# EAGLE board Arduino HomeMonitorv2r1 (EAGLE 6.5.0)
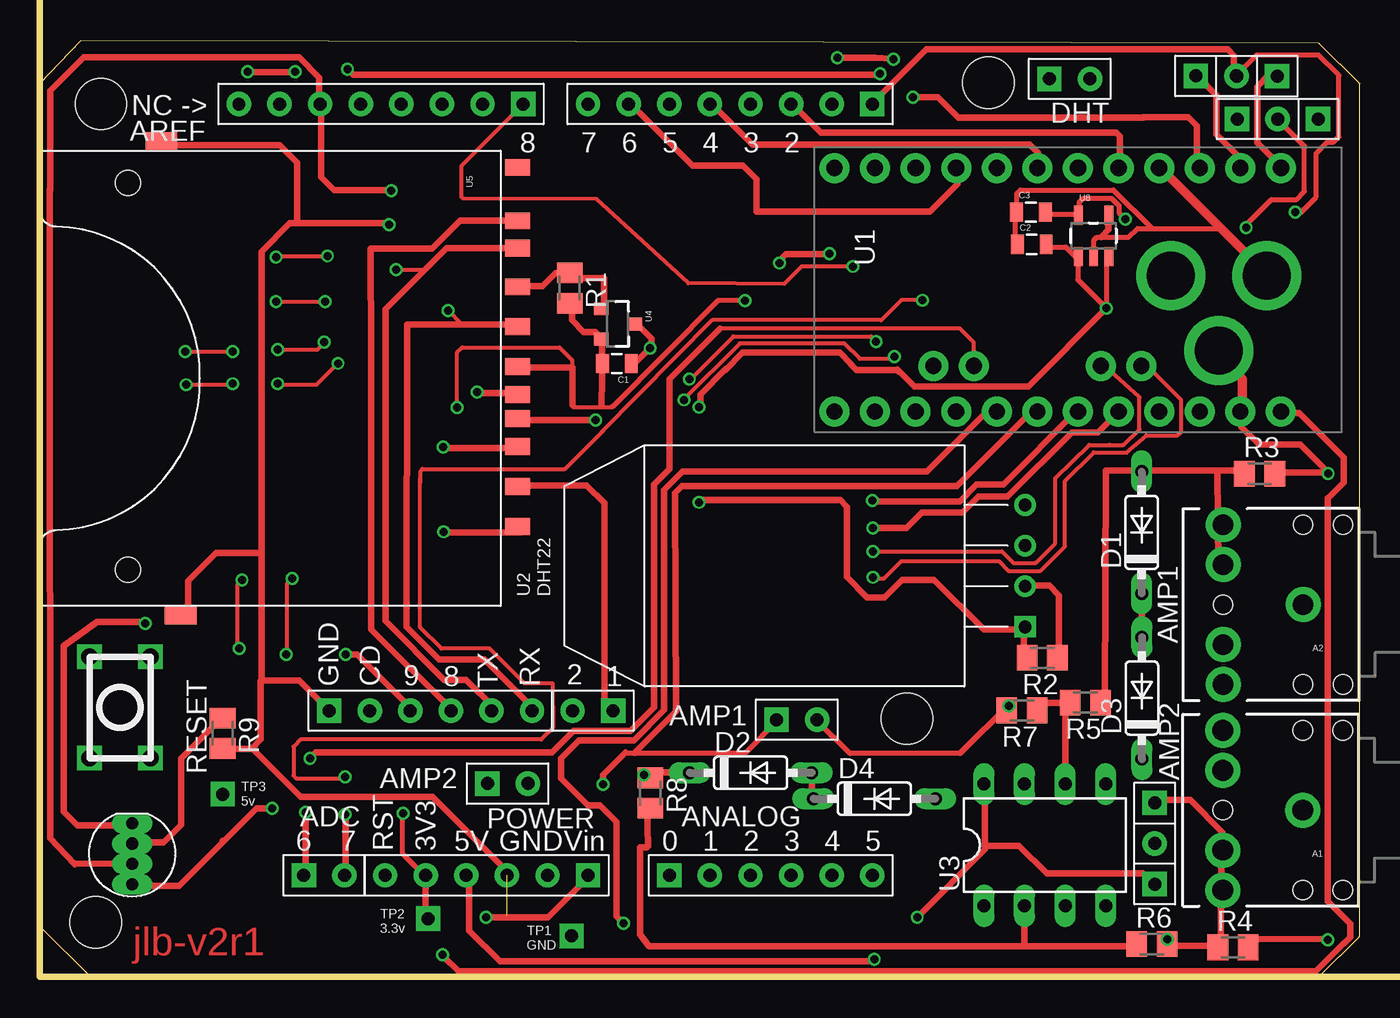
[diagram p0: board, top side]
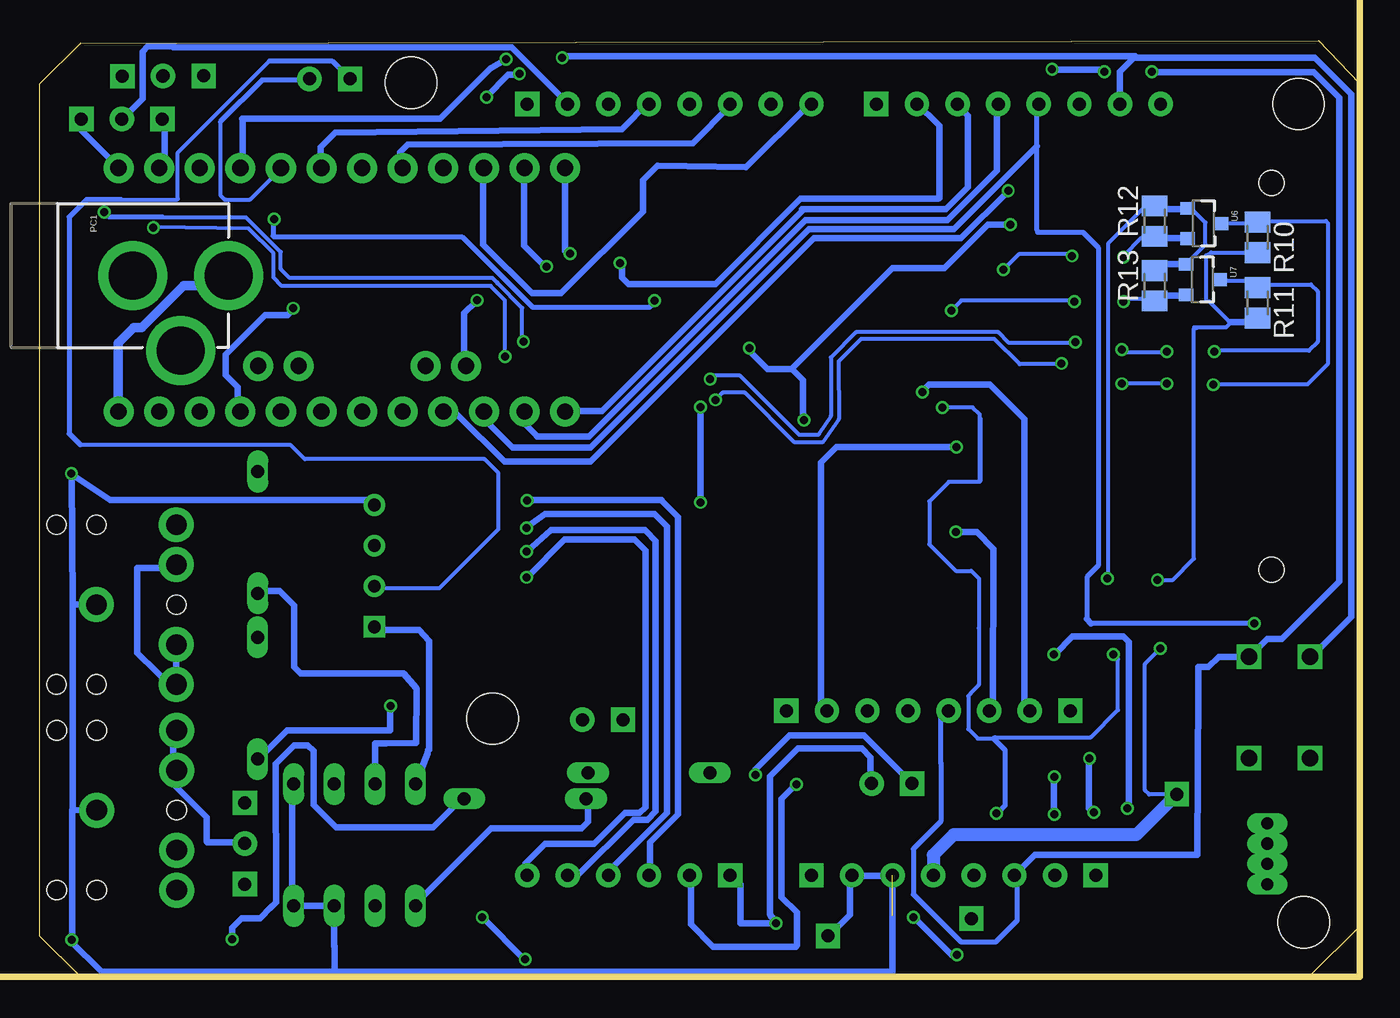
[diagram p1: board, bottom side, seen from below]

Size 82.55 x 58.57 mm. Coordinates in mm from the lower left corner, seen from the top.
Outline: 0,3.17 3.17,0 80.01,0 82.55,2.54 82.55,55.88 80.01,58.42 2.54,58.57 0,55.88 0,3.17
Copper layers (1*16): Top 0.035mm / dielectric 1.5mm / Bottom 0.035mm
Design rules "default": minimum track width 0.1mm, minimum drill 0.3mm, track to track 6mil, track to pad 6mil, pad to pad 6mil, via to via 6mil, smd to smd 6mil, copper to edge 10mil, drill to drill 10mil, minimum pad ring 10mil, minimum via ring 6mil, stop-mask expansion 2mil, vias tented up to drill 25mil, thermal gap 10mil
Net classes: 0 default: width 0.003 mm, drill 0.254 mm, clearance 0.152 mm
Holes 3.2 mm at 3.81,54.61 3.48,3.41 59.33,55.94 54.24,16.15
Milling: 4 lines

## Footprints (pad centres in the part's own frame; a part is rotated, then mirrored left to right if it is on the bottom)
AUDIO-JACK = drill 1.3 pad 2.184: RING 5,5; RSH 5,2.5; SLEEVE 0,0; TIP 5,-5; TSH 5,-2.5 | hole 1.2: 0,5; -2.5,5; -2.5,-5; 0,-5; 5,0
CK_1*2 = drill 0.813 pad 1.524 square: 1 0,1.27 | drill 0.813 pad 1.524: 2 0,-1.27
0805 = smd 0.8 x 1.2: 1 -0.9,0; 2 0.9,0
DO35-7 = drill 0.813 long: A 3.81,0; C -3.81,0
LED-RGB-THRU = drill 0.762 pad 0.889 long: 1 1.905,0; 2 0.635,0; 3 -0.635,0; 4 -1.905,0
CK_1X8 = drill 0.813 pad 1.524 square: 1 0,8.89 | drill 0.813 pad 1.524: 2 0,6.35; 3 0,3.81; 4 0,1.27; 5 0,-1.27; 6 0,-3.81; 7 0,-6.35; 8 0,-8.89
CK_1*6 = drill 0.813 pad 1.524 square: 1 0,6.35 | drill 0.813 pad 1.524: 2 0,3.81; 3 0,1.27; 4 0,-1.27; 5 0,-3.81; 6 0,-6.35
POWER_JACK_PTH = drill 2.997 pad 4.318: GND 0,7.7; GNDBREAK 4.7,10.7; PWR 0,13.7
M0805 = smd 1.3 x 1.6: 1 -0.95,0; 2 0.95,0
ARDUINO_PRO_MINI = drill 1.016 pad 1.88: 1 -7.62,12.7; 2 -7.62,10.16; 3 -7.62,7.62; 4 -7.62,5.08; 5 -7.62,2.54; 6 -7.62,0; 7 -7.62,-2.54; 8 -7.62,-5.08; 9 -7.62,-7.62; 10 -7.62,-10.16; 11 -7.62,-12.7; 12 -7.62,-15.24; 13 7.62,-15.24; 14 7.62,-12.7; 15 7.62,-10.16; 16 7.62,-7.62; 17 7.62,-5.08; 18 7.62,-2.54; 19 7.62,0; 20 7.62,2.54; 21 7.62,5.08; 22 7.62,7.62; 23 7.62,10.16; 24 7.62,12.7; A4 4.763,1.429; A5 4.763,3.969; A6 4.763,-9.049; A7 4.763,-6.509
AM2302 = drill 0.8 pad 1.35 square: P$1 -3.81,-13.8 | drill 0.8 pad 1.35: P$2 -1.27,-13.8; P$3 1.27,-13.8; P$4 3.81,-13.8
DIL08 = drill 0.813 long: 1 -3.81,-3.81; 2 -1.27,-3.81; 3 1.27,-3.81; 4 3.81,-3.81; 5 3.81,3.81; 6 1.27,3.81; 7 -1.27,3.81; 8 -3.81,3.81
SOT23-3 = smd 0.8 x 0.9: 1 -0.95,-1; 2 0.95,-1; 3 0,1.1
SD_MMC_SOCKET = smd 1.05 x 1.56: 1 6.77,29.87; 2 4.27,29.87; 3 2.52,29.87; 4 -0.73,29.87; 5 -3.23,29.87; 6 -5.73,29.87; 7 -8.15,29.87; 8 -9.85,29.87; 9 9.27,29.87; CD 1.02,29.87; WP -13.2,29.87 | smd 1.2 x 2: S1 -14.8,7.6; S2 14.8,8.8 | hole 1.55: 11.98,5.5; -12.22,5.5
SOT23-5 = smd 0.55 x 1.2: 1 -0.95,-1.3; 2 0,-1.3; 3 0.95,-1.3; 4 0.95,1.3; 5 -0.95,1.3

## Placement (x,y rotation side)
A1  [AUDIO-JACK]  79,10.43 180 top
A2  [AUDIO-JACK]  79.02,23.29 180 top
ADC6_1  CK_12  [CK_1*2]  64.42,56.18 90 top
ADC6_2  CK_12  [CK_1*2]  34.59,16.65 270 top
ADC6_3  CK_12  [CK_1*2]  29.26,12.09 90 top
ADC6_4  CK_12  [CK_1*2]  47.34,16.09 90 top
ADC6_5  CK_12  [CK_1*2]  69.74,7.07 180 top
ADC6_6  CK_12  [CK_1*2]  69.74,9.61 0 top
ADC6_7  CK_12  [CK_1*2]  17.78,6.35 90 top
ADC6_8  CK_12  [CK_1*2]  73.58,56.36 90 top
ADC6_9  CK_12  [CK_1*2]  76.13,56.35 270 top
ADC6_10  CK_12  [CK_1*2]  76.16,53.67 90 top
ADC6_11  CK_12  [CK_1*2]  78.69,53.67 270 top
C1  0.1uF  [0805]  36.1,38.36 180 top
C2  10uF  [0805]  62.04,45.82 0 top
C3  10uF  [0805]  61.99,47.85 0 top
D1  [DO35-7]  68.92,27.8 90 top
D2  [DO35-7]  44.46,12.77 0 top
D3  [DO35-7]  68.93,17.44 90 top
D4  [DO35-7]  52.2,11.14 0 top
E$1  [LED-RGB-THRU]  5.77,7.7 90 top
PB  CK_1X8  [CK_1X8]  21.34,54.61 270 top
PC  [CK_1*6]  45.72,6.35 90 top
PC1  [POWER_JACK_PTH]  84.45,43.88 270 bottom
PD  CK_1X8  [CK_1X8]  43.18,54.61 270 top
POWER  [CK_1*6]  27.94,6.35 270 top
POWER1  [CK_1*6]  24.44,16.65 90 top
R1  100k  [M0805]  33.13,43.09 270 top
R2  [M0805]  62.7,19.96 180 top
R3  [M0805]  76.3,31.48 0 top
R4  [M0805]  74.63,1.85 0 top
R5  [M0805]  65.4,17.16 180 top
R6  [M0805]  69.56,2.05 0 top
R7  [M0805]  61.43,16.67 180 top
R8  [M0805]  38.19,11.5 270 top
R9  [M0805]  11.43,15.24 270 top
R10  [M0805]  6.38,46.27 270 bottom
R11  [M0805]  6.38,42.16 270 bottom
R12  [M0805]  12.83,47.28 90 bottom
R13  [M0805]  12.82,43.24 90 bottom
U1  [ARDUINO_PRO_MINI]  64.94,42.99 270 top
U2  DHT22  [AM2302]  47.83,25.71 90 top
U3  [DIL08]  62.87,8.26 0 top
U4  ATSHA204-TSU  [SOT23-3]  36.12,40.84 270 top
U5  [SD_MMC_SOCKET]  0,37.44 270 top
U6  BSS138  [SOT23-3]  9.77,47.13 270 bottom
U7  [SOT23-3]  9.84,43.62 270 bottom
U8  MIC5219-3.3  [SOT23-5]  65.91,46.35 0 top

## Library data of the parts
A1 A2 PC1 = SparkFun-Connectors
ADC6_1-ADC6_11 PB PC PD POWER POWER1 = CONNECTER
C1-C3 = SparkFun-Passives
D1-D4 R1-R13 U3 = adafruit
E$1 = SparkFun-LED
U1 = SparkFun-Boards-Custom
U2 = sensor
U4 U6 U7 = SparkFun-DigitalIC
U5 = SparkFun-RF
U8 = SparkFun-PowerIC

## Nets
---: U3.3 U3.4
RST: POWER.6
S$5: U3.7
S$10: U3.2
S$11: U3.6
S$25: POWER.4
S$31: D3.A
S$263: A1.SLEEVE A2.SLEEVE

## Tracks (layer width: path | path; a pad name or v marks a point on that pad's centre or on a via)
---  (1 unrouted)
  Bottom 0.406: 80.67,2.24 78.68,0.33 64.11,0.33 | 64.11,0.33 29.21,0.33 29.21,6.35 | 64.11,0.33 64.11,1.91 64.14,1.91 U3.3 U3.4
LED-  (via drill 1.02 pad 1.52)
  Top 0.406: v3.1,13.68 v3.1,20.03
RST  (via drill 1.02 pad 1.52)
  Top 0.406: v6.91,20.03 v6.91,13.68
  Bottom 0.406: POWER.6 20.32,7.62 10.16,7.62 10.09,18.12 10.09,19.39 9.45,19.39 8.82,20.03 v6.91,20.03
S$1
  Bottom 0.305: 20.18,46.71 20.18,54.39
  Bottom 0.406: 20.18,54.39 20.1,54.46
S$2
  Top 0.406: 2.19,7.09 5.94,7.07
S$3
  Top 0.406: 13.23,14.34 13.23,14.33 16.3,11.26 24.57,11.26 29.17,6.66
S$4
  Bottom 0.406: 80.59,31.48 78.16,29.85 61.93,29.85 61.58,29.5
S$5
  Bottom 0.406: 59,18.03 59.01,14.63 60.89,14.61 61.59,14.61 U3.7
S$6
  Bottom 0.406: 74.22,12.2 74.22,12.07 72.12,9.97 72.12,8.47 72.08,8.42 69.94,8.42 69.77,8.26
S$7
  Bottom 0.406: 68.97,24.15 67.55,24.15 66.64,23.24 66.64,19.38 66.23,18.98 59.79,18.98 59.02,18.07
S$8
  Bottom 0.406: 74.03,20.44 74.03,17.9 76.48,20.26 76.48,25.58 73.84,25.58
S$9
  Bottom 0.406: 48.27,10.95 48.27,9.68 48.66,9.3 54.32,9.3 59.05,4.57
S$10
  Top 0.406: 68.33,1.93 61.58,1.91 | 61.58,1.91 U3.2 | 61.58,1.91 38.1,1.91 37.53,2.66 37.54,8.1
S$11
  Top 0.406: U3.6 64.14,17.14 62.87,17.14
S$12
  Top 0.406: 66.63,17.36 66.67,31.67 69.77,31.66 73.66,31.66 | 75.39,31.66 73.66,31.66 | 73.66,31.66 73.7,25.6
S$13
  Top 0.406: 37.98,12.81 40.53,12.81
S$14
  Top 0.406: 73.6,58.03 55.46,58.03 52.09,54.66
S$15
  Bottom 0.305: 20.15,46.58 17.3,46.58 16.34,45.62 16.34,25.73 17.05,25.02 17.05,22.38
  Bottom 0.406: 17.05,22.38 16.8,22.12
S$16
  Top 0.406: 0.63,49.21 0.63,55.43 2.74,57.53 16.21,57.53 17.47,56.27 17.47,54.58 17.68,54.37
S$17
  Top 0.406: 11.55,8.55 8.7,5.7 5.63,5.7 5.55,5.78
S$18
  Top 0.406: 0.61,49.25 0.61,39.45 0.63,8.67 2.17,7.05
S$19
  Top 0.406: 13.82,18.5 13.82,16.59 13.82,14.84 13.23,14.26 11.4,14.26 11.33,14.33
S$20
  Top 0.406: 11.18,16.23 11.18,16.01 8.85,13.67 8.85,9.5 7.75,8.41 5.78,8.41
S$21
  Top 0.406: 13.84,26.52 11.01,26.52 9.27,24.78 9.27,22.83 9.13,22.68
S$22
  Bottom 0.406: 74.2,58.17 53.05,58.17 49.57,54.69
S$23
  Bottom 0.406: 66.77,4.52 66.77,12.13 66.72,12.18
S$24
  Top 0.406: 73.91,8.01 73.87,1.95 70.6,1.94
S$25  (via drill 0.81 pad 1.52)
  Bottom 0.813: POWER.4 26.67,7.62 25.4,8.89 13.97,8.89 v11.43,11.43
  other vias: 33.25,2.56 24.28,3.64
S$26
  Top 0.406: 5.58,9.48 2.32,9.48 1.47,10.32 1.47,20.7 3.49,22.13
S$27  (via drill 0.5)
  other vias: 6.59,22.11
S$28
  Bottom 0.305: 6.71,22.11 16.74,22.11
S$29
  Top 0.406: 37.98,8.1 37.52,8.1
S$30
  Top 0.406: 48.31,12.8 48.31,11.1
S$31
  Top 0.406: 68.92,24.09 D3.A
S$32
  Bottom 0.406: 61.47,21.7 58.84,21.7 58.22,21 58.22,14.19
S$33  (via drill 0.5)
  other vias: 60.62,16.95
S$34
  Bottom 0.406: 60.64,16.9 60.64,15.43 67.08,15.43 68.91,13.6
S$35
  Bottom 0.406: 38.8,5.87 39.27,6.34
S$36
  Bottom 0.406: 35.27,1.89 40.43,1.89 41.83,3.28 41.83,6.22 41.93,6.32
S$37  (via drill 0.5)
  other vias: 36.51,3.35
S$38
  Bottom 0.406: 38.74,5.78 38.74,3.35
S$39
  Bottom 0.406: 35.19,1.96 35.19,4.02 36.16,4.99 36.16,11.13 35.28,12.01
S$40
  Top 0.406: 57.61,14.03 60.64,17.06
S$41
  Top 0.254: 26.38,48.76 26.38,50.75 30.27,54.64
S$42  (via drill 0.5)
  other vias: 25.25,27.84
S$43
  Bottom 0.406: 20.97,34.28 20.97,34.91 23.13,37.07 26.93,37.07 27.32,36.68
S$44  (via drill 0.5)
  other vias: 25.22,33.14
S$45
  Bottom 0.406: 20.97,34.31 20.97,16.94 20.62,16.59
S$46  (via drill 0.5)
  other vias: 27.34,36.59
S$47
  Top 0.406: 30.41,40.8 25.3,40.8 22.96,40.81 22.94,21.88 24.96,19.86 27.8,19.86 31.09,16.57
S$48
  Top 0.406: 21.61,38.7 21.61,22.26 25.27,18.59 26.66,18.59 28.43,16.82
S$49
  Top 0.406: 20.73,39.08 20.73,21.75 25.78,16.69
S$50
  Top 0.406: 61.55,21.75 61.55,20.11 61.68,19.98
S$51
  Top 0.406: 57.38,50.69 57.38,49.59 55.8,48.01
S$52
  Top 0.406: 25.28,27.82 28.89,27.82 30.05,27.82
S$53
  Bottom 0.406: 25.17,27.83 23.94,27.83 22.9,26.78 22.94,16.96 23.24,16.59
S$54
  Top 0.406: 29.7,30.75 34.2,30.75 35.32,29.64 35.32,17.15 35.88,16.59
S$55
  Top 0.406: 61.74,24.48 63.14,24.48 63.76,23.87 63.76,20.01
S$56
  Bottom 0.406: 25.27,33.14 32.73,33.14 33.7,32.17 33.7,16.85 33.39,16.54
S$57
  Top 0.406: 25.27,33.09 28.67,33.09 30.04,33.09
S$58
  Bottom 0.254: 61.68,24.32 57.56,24.32 53.87,28 53.87,31.52 54.75,32.39 65.98,32.39 66.86,33.27 80.04,33.27
S$59
  Bottom 0.406: 26.29,48.72 26.29,53.24 27.77,54.72
S$60
  Top 0.406: 67.57,50.56 67.57,52.59 67.33,52.83 48.85,52.83 47.17,54.5
S$61
  Bottom 0.406: 65,50.64 65,51.91 64.08,52.83 46.15,53.03 44.48,54.71
S$62
  Top 0.406: 62.44,50.62 62.44,51.55 61.93,52.06 44.56,52.06 42.06,54.55
S$63
  Bottom 0.406: 60.03,50.79 60.03,51.59 59.56,52.06 41.71,52.16 39.38,54.49
S$64
  Top 0.406: 20.71,39.08 20.7,45.57
S$65
  Top 0.406: 55.68,47.89 44.83,47.89 44.83,49.9 43.98,50.75 40.81,50.75 36.91,54.65
S$66
  Bottom 0.406: 49.71,50.69 49.71,45.39 49.52,45.21
S$67
  Bottom 0.406: 52.27,50.51 52.27,45.76 50.99,44.48
S$68
  Bottom 0.406: 54.82,50.81 54.82,45.82 51.78,42.77 49.95,42.77 44.83,47.89 44.83,49.84 43.92,50.75 38.37,50.65 34.47,54.55
S$69  (via drill 0.5)
  Top 0.254: v50.87,44.45 47.65,44.45 46.56,43.35 40.56,43.39 34.8,48.66 26.48,48.69
S$70  (via drill 0.5)
  other vias: 49.38,45.26
S$71  (via drill 0.5)
  other vias: 46.26,44.67
S$72
  Top 0.406: 49.21,45.21 46.67,45.21 46.23,44.77
S$73
  Bottom 0.406: 46.14,44.68 46.14,43.75 45.74,43.35 40.29,43.35 34.96,48.68 26.36,48.68
S$74
  Bottom 0.406: 49.81,35.4 47.4,35.4 34.86,47.94
S$75
  Bottom 0.406: 34.87,48.03 25.88,48.03 24.49,49.42 24.49,53.88 25.15,54.54
S$76
  Bottom 0.254: 70.95,48.64 69.41,48.64 67.5,50.54
S$77
  Bottom 0.406: 52.31,35.2 52.31,34.67 51.47,33.83
S$78
  Bottom 0.406: 51.44,33.8 48.21,33.8 34.66,47.34 25.78,47.34 22.68,50.44 22.68,54.5 22.58,54.6
S$79
  Bottom 0.406: 54.9,35.24 54.9,35.02 53,33.12 48.1,33.12 34.43,46.79 25.36,46.79 20.18,51.98
S$80
  Bottom 0.406: 57.37,35.16 56.42,35.16 53.5,32.24 48.09,32.24 34.13,46.2 24.92,46.2 22,49.13
S$81  (via drill 0.5)
  other vias: 21.98,49.18
S$82
  Top 0.406: 21.87,49.22 18.41,49.22 17.58,50.05 17.58,54.48 17.46,54.59
S$83
  Bottom 0.406: 15,54.69 15,56.62 14.12,57.5 2.81,57.5 0.53,55.22
S$84
  Bottom 0.406: 14.03,57.6 49.73,57.6 49.75,57.58
S$85  (via drill 0.5)
  other vias: 49.87,57.52
S$86
  Top 0.406: 49.75,57.52 52.25,57.52 53.33,57.44
S$87  (via drill 0.5)
  other vias: 53.39,57.42
S$88
  Bottom 0.406: 53.41,57.4 54.38,56.83 57.52,53.69 69.91,53.69
S$89  (via drill 0.5)
  other vias: 52.56,56.49
S$90
  Top 0.406: 54.59,55.03 56.18,55.03 57.45,53.77 69.04,53.77
S$91  (via drill 0.5)
  other vias: 54.62,55.03
S$92
  Bottom 0.406: 52.62,56.43 53.25,56.43 54.62,55.07
S$93
  Top 0.406: 52.56,56.43 19.58,56.43 19.33,56.68
S$94
  Bottom 0.406: 69.87,53.63 69.87,50.78 70.01,50.63
S$95
  Top 0.406: 68.99,53.77 71.83,53.77 72.36,53.24 72.36,50.95 72.66,50.66
S$96
  Bottom 0.406: 0.51,55.14 0.51,22.52 3.17,19.86
S$97
  Top 0.406: 3.56,22.22 6.5,22.22 6.59,22.12
S$98  (via drill 0.5)
  other vias: 15.96,56.62
S$99  (via drill 0.5)
  other vias: 13,56.62
S$100  (via drill 0.5)
  other vias: 19.23,56.79
S$101
  Bottom 0.406: 19.23,56.76 16.1,56.76 15.99,56.65
S$102
  Top 0.406: 15.85,56.58 13,56.58 12.96,56.62
S$103
  Bottom 0.406: 12.97,56.6 2.86,56.6 1.28,55.02 1.28,24.74 4.87,21.14 5.79,21.14 7,19.92
S$104
  Top 0.406: 59.89,35.15 59.01,35.15 55.47,31.61 40.18,31.61 39.04,30.47 39.04,16.69 37.15,14.79 33.74,14.79 32.6,13.65 32.6,12.42 34.3,10.72 35.03,10.72 36.06,9.69 36.06,3.78 36.39,3.45
S$105
  Top 0.406: 62.37,35.19 61.84,35.19 57.37,30.71 40.18,30.71 39.74,30.27 39.78,16.61 37.2,14.02
S$106
  Bottom 0.406: 58.26,14.2 58.3,13.97 59.05,12.06
S$107  (via drill 0.5)
  Top 0.406: 59.12,12.06 59.12,7.97 v54.88,3.73
S$108  (via drill 0.5)
  other vias: 52.19,1.1
S$109
  Bottom 0.406: 54.87,3.65 54.81,3.65 52.25,1.1
S$110
  Top 0.406: 52.2,0.96 28.77,0.96 26.84,2.9 26.84,6.23 26.58,6.49
S$111
  Bottom 0.406: 44.38,6.4 44.38,8.42 42.62,10.18 42.62,28.78 43.59,29.74
S$112
  Bottom 0.406: 46.83,6.32 46.83,6.76 43.33,10.26 43.33,28.16 44.12,28.95
S$113
  Bottom 0.406: 49.55,6.32 48.94,6.32 45.43,9.83 44.55,9.83 44.03,10.35 44.03,27.28 44.64,27.9
S$114
  Bottom 0.406: 52.18,6.32 52.18,7.11 50.96,8.33 47.89,8.33 45.96,10.26 45.03,10.26 44.68,10.61 44.68,26.68 45.36,27.36
S$115
  Bottom 0.406: 43.68,29.83 51.99,29.83
S$116  (via drill 0.5)
  other vias: 52.08,29.81
S$117
  Top 0.406: 52.19,29.74 57.54,29.74 58.59,30.8 60.26,30.8 64.82,35.36
S$118
  Bottom 0.406: 44.12,28.95 50.96,28.95 52.05,28.16
S$119  (via drill 0.5)
  other vias: 52.1,28.08
S$120
  Top 0.406: 52.12,28.09 54.19,28.09 55.16,29.06 57.72,29.06 58.7,30.04 60.52,30.04 64.54,34.06 66.19,34.06 67.53,35.4
S$121  (via drill 0.5)
  other vias: 52.11,26.61
S$122  (via drill 0.5)
  other vias: 52.11,25
S$123
  Bottom 0.406: 44.7,27.96 50.59,27.96 52.06,26.63
S$124
  Bottom 0.406: 45.36,27.35 49.73,27.35 52.06,25.02
S$125
  Top 0.254: 52.19,26.63 60.16,26.63 60.89,25.89 62.29,25.89 63.51,27.11 63.51,31.2 65.64,33.26
S$126
  Top 0.254: 66.86,33.27 67.77,33.28 68.79,34.24 68.78,36.27 66.38,38.45
S$127
  Top 0.254: 52.13,24.92 52.8,24.92 53.89,26.02 59.98,26.02 60.59,25.41 62.6,25.41 64.12,26.93 64.12,31.01 65.91,32.78
S$128
  Top 0.254: 58.42,38.54 58.42,39.69 57.54,40.56 42.55,40.56
  Top 0.406: 42.55,40.56 39.38,37.4 39.38,31.78 38.42,30.82 38.42,16.86 36.95,15.39 33.37,15.39 32.02,14.04 17.25,14.04 16.89,13.67
S$129
  Bottom 0.406: 56.01,38.23 56.01,41.52 55.28,42.26
S$130  (via drill 0.5)
  other vias: 55.2,42.33
S$131  (via drill 0.5)
  Top 0.254: 32.08,18.36 32.09,15.57 31.36,14.84 16.3,14.84 15.86,14.4 15.86,12.57 16.01,12.43 19.01,12.43
  Top 0.406: 19.01,12.43 v19.08,12.5
S$132  (via drill 0.5)
  other vias: 16.89,13.67
S$133  (via drill 0.5)
  other vias: 19.08,10.16
S$134  (via drill 0.5)
  other vias: 16.63,10.29
S$135
  Top 0.406: 19.13,10.17 19.13,6.33 19.19,6.27
S$136
  Top 0.406: 16.63,10.23 16.63,6.33 16.51,6.21
S$137
  Bottom 0.406: 19.13,12.48 19.13,10.29 19,10.17
S$138
  Bottom 0.406: 16.93,13.52 16.93,10.54 16.69,10.29
S$139
  Bottom 0.61: 77.65,35.59 77.65,39.66 76.69,40.62 76.19,40.62 73.55,43.26 71.7,43.26 71.08,43.89
S$140
  Top 0.61: 75.22,35.57 75.22,37.38 74.86,37.75
S$141
  Top 0.254: 26.11,35.51 26.11,39.08 26.41,39.38 32.49,39.38 33.3,38.58 33.3,35.71 33.35,35.66 35.77,35.66 35.81,35.71
S$142
  Top 0.61: 75.86,44.86 70.15,50.56
S$143
  Top 0.406: 61.66,21.72 59.04,21.72 55.94,24.83 53.91,24.83 53.32,24.24 | 53.32,24.24 | 53.32,24.24 52.83,23.75 51.74,23.75 50.49,25.01 50.49,29.41 50.07,29.82 41.38,29.82 41.3,29.75
S$144  (via drill 0.5)
  Bottom 0.406: v41.22,29.69 41.22,35.38
S$145  (via drill 0.5)
  other vias: 41.22,35.64
S$146
  Top 0.406: 41.31,35.64 41.31,36.43 42.89,38.01
S$147  (via drill 0.5)
  Top 0.406: 53.63,38.01 54.7,36.94 61.82,36.94 v66.71,41.83
S$148
  Bottom 0.406: 70.19,35.59 70.19,36.89 70.95,37.64 70.95,38.94 68.47,41.42 67.05,41.42 66.76,41.71
S$149
  Bottom 0.406: 29.29,6.32 31.92,6.32
S$150
  Top 0.305: 64.92,44.53 64.92,43.62 66.74,41.8 66.74,44.73 66.77,44.76
S$151
  Top 0.305: 65.94,45.5 65.94,46.1 66.11,46.27 68.1,46.27 68.65,46.81 73.93,46.81 74.53,46.22
S$152
  Top 0.305: 64.93,47.7 63,47.7 62.9,47.8
S$153
  Top 0.305: 61.13,48.21 61.13,49.02 61.33,49.22 67.16,49.22 69.55,46.84
S$154
  Top 0.305: 63.26,45.67 64.17,45.67 64.88,44.96
S$155
  Top 0.305: 61.03,45.82 61.03,47.85 61.08,47.9
S$156
  Top 0.406: 20.78,45.55 23.99,45.55
S$157  (via drill 0.5)
  Top 0.305: 65.01,48.05 65.01,48.46 65.26,48.71 67.04,48.71 67.49,48.26 67.49,47.8 v67.9,47.4
S$158
  Bottom 0.305: 67.96,47.4 67.96,46.37 67.9,46.3 56.15,46.3 51.73,41.89 44.42,41.89 44.06,42.26
S$159  (via drill 0.5)
  other vias: 44.1,42.32
S$160
  Top 0.305: 44,42.32 42.43,42.32 35.82,35.66
S$161  (via drill 0.5)
  other vias: 26.09,35.63
S$162
  Bottom 0.254: 23.81,21.83 23.81,18.27 24.3,17.78
S$163  (via drill 0.5)
  other vias: 22.72,10.24
S$164
  Top 0.305: 22.66,10.3 22.66,7.74 23.94,6.46
S$165
  Top 0.406: 24,45.57 24.54,45.57 26.28,47.3 30.11,47.3 30.13,47.29
S$166
  Top 0.406: 16.09,47.32 16.09,50.94 15,52.03 7.61,52.03 7.54,51.96
S$167
  Bottom 0.406: 74.22,12.38 74.22,15.61
S$168
  Top 0.406: 21.62,38.72 21.62,41
S$169
  Top 0.406: 73.97,8.01 73.97,9.05 71.95,11.06 69.77,11.06 69.73,11.02
S$170
  Top 0.406: 59.11,8.21 61.24,8.21 62.99,6.46 68.99,6.46 69.73,5.73
S$171
  Top 0.406: 29.78,38.11 30.8,38.11 33.31,38.12 33.31,35.76
S$172
  Top 0.406: 35.28,41.93 35.28,43.72 33.7,43.72 33.38,44.03
S$173
  Top 0.406: 33.28,41.93 33.28,41.08 34.01,40.35 34.75,40.35 35.17,39.93 35.17,37.4 35.13,35.77
S$174
  Top 0.406: 13.83,18.55 16.22,18.54 18.11,16.64
S$175
  Top 0.406: 13.87,18.61 13.87,45.39 15.62,47.14 21.68,47.14
S$176  (via drill 0.5)
  Bottom 0.406: v21.85,47.05 23.26,47.05 25.98,44.33 29.22,44.33 35.54,38.01 37.03,38.01 38.26,39.24
S$177  (via drill 0.5)
  other vias: 38.18,39.33
S$178
  Top 0.406: 38.26,39.5 38.26,39.94 37.39,40.82
S$179  (via drill 0.5)
  other vias: 34.76,34.84
S$180
  Top 0.254: 65.64,33.27 66.91,33.27
S$181
  Top 0.406: 34.78,34.83 29.69,34.84
S$182
  Top 0.406: 37.14,38.26 37.14,38.31 38.21,39.38
S$183
  Bottom 0.406: 10.82,48.03 12.79,48.03 12.87,47.96
S$184
  Bottom 0.406: 10.82,46.2 12.72,46.2 12.87,46.06
S$185
  Bottom 0.406: 10.75,44.59 12.79,44.59
S$186
  Bottom 0.406: 10.82,42.62 12.94,42.62
S$187
  Bottom 0.254: 10.66,44.66 10.66,44.81 9.64,45.82 9.64,47.19 10.56,48.1
S$188
  Bottom 0.254: 8.33,43.57 6.14,43.57 6.07,43.5
S$189
  Bottom 0.254: 8.63,47.15 6.14,47.15 6,47.3
S$190
  Bottom 0.254: 6.43,41.01 8.18,41.01 9.44,42.27
S$191
  Bottom 0.254: 9.59,42.3 9.59,45.14 9.29,45.31 6.29,45.31 6.24,45.26
S$192  (via drill 0.5)
  Bottom 0.254: 11.41,11.41 13.16,11.41 13.43,11.67 13.43,19.57 v12.46,20.54
S$193  (via drill 0.5)
  Top 0.254: 12.37,20.54 12.37,24.58 v12.64,24.84
S$194
  Bottom 0.254: 10.35,40.64 8.34,40.64 8.07,40.9 6.76,40.9 6.67,40.99
S$195  (via drill 0.5)
  Bottom 0.254: 22.78,14.99 16.81,14.99 15.11,16.69 15.11,19.86 v15.41,20.17
S$196  (via drill 0.5)
  other vias: 15.78,24.92
S$197
  Top 0.254: 15.47,20.11 15.47,24.61 15.72,24.86
S$198
  Bottom 0.254: 15.7,24.84 15.7,45.91 13.42,48.19
S$199
  Bottom 0.254: 13.08,42.4 14.62,42.4 14.69,42.33
S$200
  Bottom 0.254: 13.3,46.2 13.67,46.2 14.76,45.11
S$201  (via drill 0.5)
  Top 0.254: v14.76,42.26 17.83,42.26 17.91,42.33
S$202  (via drill 0.5)
  other vias: 14.76,45.03
S$203
  Top 0.254: 14.76,45.11 17.91,45.11 17.98,45.18
S$204  (via drill 0.5)
  other vias: 17.84,42.25
S$205  (via drill 0.5)
  other vias: 17.98,45.11
S$206
  Bottom 0.254: 17.8,42.31 24.91,42.31 25.49,41.72
S$207  (via drill 0.5)
  other vias: 25.54,41.68
S$208
  Top 0.254: 25.54,41.67 25.55,41.67 26.34,40.88
S$209  (via drill 0.5)
  Bottom 0.254: 18.07,45.21 21.31,45.21 v22.28,44.24
S$210
  Top 0.254: 22.19,44.24 24.13,44.24
S$211
  Bottom 0.254: 5.89,47.28 2.1,47.28 2,47.18 2,38.33 3.26,37.07 9.12,37.07 9.22,36.96
S$212
  Bottom 0.254: 12.72,24.84 11.67,24.84 10.35,26.16 10.35,40.56 10.03,40.65
S$213  (via drill 0.5)
  other vias: 9.14,37.04
S$214  (via drill 0.5)
  Top 0.254: 9.08,37.04 12,37.04 v12.06,37.1
S$215  (via drill 0.5)
  Bottom 0.254: 11.94,37.1 v14.86,37.1
S$216  (via drill 0.5)
  other vias: 12.06,39.12
S$217  (via drill 0.5)
  other vias: 14.86,39.24
S$218
  Bottom 0.254: 12.06,39.05 14.74,39.05 14.92,39.24
S$219  (via drill 0.5)
  Top 0.254: v9.08,39.12 12,39.12 12.06,39.18
S$220
  Bottom 0.254: 5.6,43.32 3.05,43.32 2.62,42.89 2.62,39.73 3.17,39.18 9.08,39.18
S$221
  Top 0.254: 14.92,37.04 17.3,37.04 18.58,38.32
S$222
  Top 0.254: 14.92,39.24 17.36,39.24 17.79,39.66
S$223  (via drill 0.5)
  other vias: 18.64,38.38
S$224  (via drill 0.5)
  other vias: 17.79,39.73
S$225
  Bottom 0.254: 18.7,38.32 21.26,38.32 22.84,39.91 31.19,39.91 32.59,38.51 32.58,34.89 33.61,33.44 35.26,33.43
S$226
  Bottom 0.254: 17.85,39.66 21.93,39.66 22.6,40.33 31.49,40.33 33.08,38.75 33.08,35.09 33.81,33.99
S$227  (via drill 0.5)
  other vias: 40.28,36.1
S$228  (via drill 0.5)
  other vias: 40.62,37.39
S$229
  Top 0.254: 40.24,36.07 43.79,39.62
S$230
  Top 0.254: 40.54,37.42 40.75,37.42 43.39,40.06
S$231  (via drill 0.5)
  Bottom 0.254: v53.46,38.82 53.46,42.31 54.37,43.22
S$232  (via drill 0.5)
  Top 0.254: 43.38,40.06 51.99,40.06 v52.31,39.75
S$233
  Top 0.254: 43.8,39.65 50.3,39.65 51.28,38.67 53.36,38.67 53.44,38.74
S$234
  Bottom 0.254: 52.38,39.72 52.38,41.85 53.92,43.39
S$235
  Bottom 0.254: 54.35,43.23 67.42,43.23 67.94,43.76 67.94,45.27 69.49,46.82 75.45,46.89
S$236
  Bottom 0.254: 53.93,43.44 53.96,43.44 54.24,43.72 66.92,43.72 67.49,44.29 67.49,45.34 69.65,47.51 74.96,47.51
S$237
  Bottom 0.305: 74.89,47.53 78.25,47.53 78.49,47.78
S$238  (via drill 0.5)
  other vias: 75.45,46.87
S$239
  Top 0.254: 75.18,50.75 75.15,50.78
S$240  (via drill 0.5)
  other vias: 78.53,47.85
S$241
  Top 0.305: 78.55,47.82 78.87,47.82 79.83,48.78 79.83,51.51 80.53,52.21 80.91,52.21 81.25,52.56 81.25,56.4 79.97,57.67 76.11,57.67 74.75,56.31
S$242
  Top 0.305: 75.47,46.89 75.47,47.07 77.04,48.64 78.61,48.64 79.1,49.13 79.1,51.98 77.42,53.66
S$243
  Bottom 0.254: 73.92,48.69 73.92,51.58 68.18,57.31
  Bottom 0.305: 68.18,57.31 64.28,57.31 63.15,56.18
S$244
  Bottom 0.254: 71.28,53.49 71.28,48.91 70.97,48.6
  Bottom 0.305: 65.7,56.1 68.67,56.1 71.28,53.49
S$245
  Top 0.406: 35.22,12.1 35.22,12.62 36.63,14.03
S$246
  Top 0.305: 36.69,14.02 44.13,14.02 46.17,16.06
S$247
  Top 0.305: 57.57,13.97 50.68,13.97 48.55,16.09
S$248
  Bottom 0.406: 36.87,3.91 36.84,3.85 36.5,3.37
S$249
  Bottom 0.406: 37.78,12.73 37.78,12.98 35.67,15.09 30.99,15.09 27.97,12.07
S$250
  Bottom 0.406: 30.59,11.97 30.59,13.74 31.14,14.29 35.12,14.29 36.88,12.53 36.88,3.92
S$251  (via drill 0.5)
  other vias: 37.78,12.63
S$252
  Top 0.406: 42.88,37.96 43.96,39.05 50.03,39.05 50.77,38.31 50.77,38.28 51.08,37.96 53.6,37.96 53.7,37.86
S$253
  Top 0.406: 27.42,36.51 29.74,36.51 29.82,36.44
S$254
  Bottom 0.305: 23.74,34.92 23.76,31.01
S$255
  Top 0.406: 32.53,44.02 32.24,44.02 31.43,43.21 29.86,43.21
S$256
  Top 0.406: 21.61,41.02 21.61,41.78 25.43,45.59 30.08,45.59
S$257
  Bottom 0.254: 33.85,33.9 35.05,33.9 38.75,37.61 40.38,37.61 40.62,37.37
S$258
  Bottom 0.254: 35.27,33.43 35.33,33.43 38.45,36.55 39.84,36.55 40.28,36.1
S$259
  Bottom 0.254: 23.76,30.96 25.7,30.96 26.91,29.75 26.91,27.06 25.26,25.41 24.29,25.41 23.81,24.92 23.81,21.84
S$260
  Bottom 0.254: 23.76,34.98 23.76,35.18 24.21,35.63 26.09,35.63
S$261
  Bottom 0.406: 38.71,3.34 36.53,3.34
S$262  (via drill 0.5)
  other vias: 35.23,12.04
S$263
  Bottom 0.406: 80.49,23.3 A2.SLEEVE | 80.58,31.36 80.49,23.3 | A1.SLEEVE 80.5,10.44 80.49,23.3
S$264
  Top 0.406: 75.77,2.38 80.55,2.34
S$265
  Bottom 0.406: 80.53,10.45 80.53,2.26 80.48,2.21
S$266  (via drill 0.5)
  other vias: 80.56,2.32
S$267  (via drill 0.5)
  other vias: 80.58,31.49
S$268
  Top 0.406: 80.58,31.56 77.05,31.56
S$269
  Top 0.406: 38.03,8.17 37.99,10.59
S$270  (via drill 0.5)
  other vias: 70.52,2.36
S$271
  Bottom 0.406: 70.52,2.34 70.52,3.07 69.92,3.67 68.76,3.67 68.07,4.37
S$272
  Bottom 0.406: 68.11,4.33 68.08,4.36 67.78,4.66 67.81,13.33 66.65,14.49 65.8,14.49 65.44,14.13 65.44,10.76 64.03,9.36 57.95,9.36 56.09,11.22
S$273
  Bottom 0.406: 34.81,34.87 34.81,37.33 35.52,38.04
S$274
  Top 0.254: 69.09,38.4 71.39,36.1 71.39,34.1 71.17,33.88 69.21,33.88 67.97,32.8
S$275
  Top 0.254: 65.9,32.81 67.99,32.81 67.99,32.79
S$276
  Bottom 0.254: 77.47,48.63 73.96,48.63
S$277
  Bottom 0.305: 77.47,48.64 79.63,48.64 80.73,47.55 80.73,33.98 80.01,33.27
S$278
  Top 0.254: 55.12,42.33 53.88,42.33 52.63,41.09 42.03,41.09 35.12,34.04
S$279
  Top 0.254: 23.8,30.93 23.8,31.6 23.92,31.78 32.85,31.78 35.23,34.16
S$280
  Bottom 0.305: 22.9,14.93 22.17,14.2 22.17,10.72 22.6,10.3
S$281
  Top 0.254: 32.07,18.36 30.32,18.36 28.14,20.53 25.12,20.53 23.79,21.86 23.79,30.98 23.79,31.19
S$282
  Bottom 0.254: 24.34,17.74 24.34,17.71 24.48,17.57 24.48,15.51 23.88,14.91 22.7,14.91
S$283
  Top 0.406: 66.85,47.37 66.85,46.74 66.39,46.28
S$284
  Top 0.406: 77.77,35.27 78.79,35.27 81.57,32.49 81.57,30.92 80.6,29.96
S$285
  Top 0.406: 80.56,29.97 80.56,4.74 81.98,3.31 81.98,2.47 81.61,2.1 81.56,2.1 79.8,0.34 26.2,0.34 25.23,1.3
S$286  (via drill 0.5)
  other vias: 25.19,1.38
S$287
  Bottom 0.406: 25.23,1.38 25.52,1.38 27.83,3.69
S$288  (via drill 0.5)
  other vias: 27.91,3.73
S$289
  Top 0.406: 27.83,3.73 31.77,3.73 34.37,6.33
S$290
  Top 0.406: 75.16,35.36 75.16,34.41 76.27,33.3 78.83,33.3 80.64,31.49
S$291
  Top 0.406: 24.13,6.39 24.13,3.77 24.34,3.56
S$292
  Bottom 0.406: 31.88,6.21 31.88,3.88 33.27,2.48
S$293
  Bottom 0.305: 26.2,13.37 26.2,16.27 25.68,16.79
S$294
  Top 0.406: 73.5,58.02 74.31,58.02 74.69,57.65 74.69,56.34 74.72,56.31
S$295
  Top 0.406: 77.37,56.38 76.82,56.38 76.15,55.71 76.15,52.19 77.62,50.73
S$296
  Bottom 0.305: 26.19,13.41 26.19,9.72 27.91,8.01 27.91,5.16 24.94,2.18 22.76,2.18 21.42,3.52 21.42,6.16 21.58,6.33
S$297
  Top 0.406: 72.3,56.33 72.43,56.33 73.6,55.16 73.6,52.71 75.54,50.77
S$298
  Bottom 0.406: 74.13,58.21 75.8,58.21 76.12,57.87 76.12,54.94 77.44,53.64
S$299
  Bottom 0.406: 80.18,53.61 80.18,53.2 77.65,50.67
S$300
  Bottom 0.406: 74.75,53.63 74.75,51.16 75.27,50.64
S$301
  Top 0.406: 11.43,8.49 11.51,8.49 13.56,10.54 14.4,10.54 14.44,10.59
S$302  (via drill 0.5)
  other vias: 14.52,10.54
S$303
  Bottom 0.406: 14.44,10.54 14.44,20.96 14.77,21.3 17.95,21.3 19.04,20.21
S$304  (via drill 0.5)
  other vias: 19.12,20.17
S$305
  Top 0.406: 19.08,20.17 19.84,20.17 23.27,16.74

## Text on the board
Top: jlb-v2r1
tPlace: NC -> | DHT | AREF | 8 | 7 | 6 | 5 | 4 | 3 | 2 | AMP1 | GND | CD | 9 | 8 | TX | RX | 2 | 1 | AMP1 | RESET | AMP2 | AMP2 | TP3 / 5v | ADC | POWER | ANALOG | 6 | 7 | RST | 3V3 | 5V | GND | Vin | 0 | 1 | 2 | 3 | 4 | 5 | TP2 / 3.3v | TP1 / GND